# Altium PCB Micromouse_PCB.PcbDoc (part 2 of 3)
Units mm, origin at the board's own origin, x right, y up, seen from the top; angles counter-clockwise.
Board outline 89.28 x 101.5 mm, 2 copper layers (Top Layer, Bottom Layer); 118 components, 108 nets, 360 pads, 157 vias.
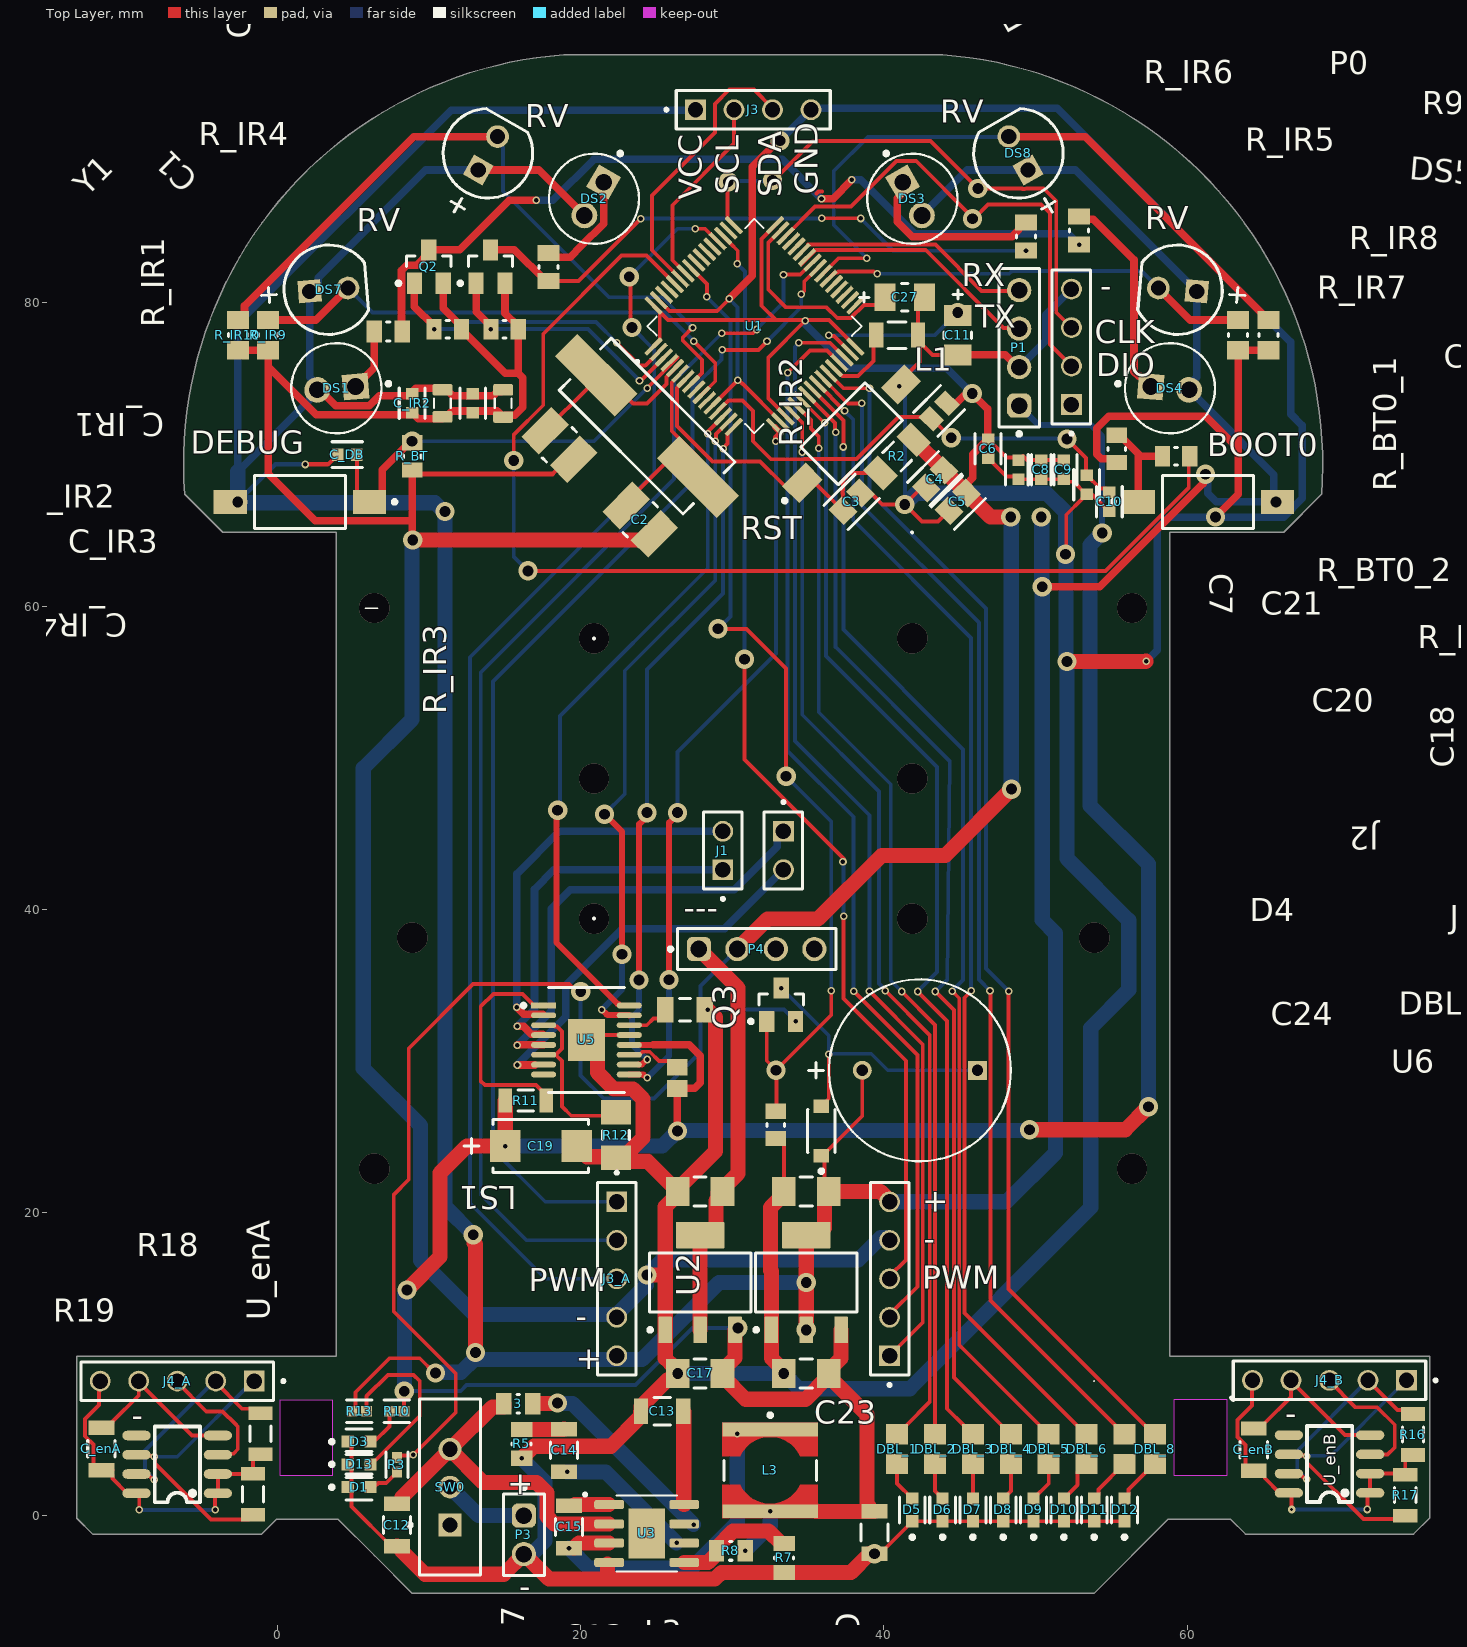
[diagram p0: Top Layer view]

## Via types
v1: diameter 0.5, hole 0.3, Top Layer to Bottom Layer, 87 vias
v2: diameter 1.27/1.27 (per signal layer), hole 0.711, Top Layer to Bottom Layer, 48 vias
v3: diameter 2, hole 2, Top Layer to Bottom Layer, 11 vias
v4: diameter 1.27, hole 0.711, Top Layer to Bottom Layer, 8 vias
v5: diameter 0.5, hole 0.2, Top Layer to Bottom Layer, 1 vias
v6: diameter 2/2 (per signal layer), hole 2, Top Layer to Bottom Layer, 1 vias
v7: diameter 1, hole 0.3, Top Layer to Bottom Layer, 1 vias

## Nets (pads, with @x,y where several pads share a name; then routed paths per layer and width w, separated by ;. In a path a pad name is that pad's centre, name@x,y a point inside that pad or via, vN(x,y) a via of type N, cw(c..) or ccw(c..) an arc to the next point about the centre after c; other vN are vias at no path point) (continued)
DBL_6: (continued)
  Bottom Layer w0.254: v1(37.403,72.882) 37.975,72.311 37.975,65.675 45.75,57.9 v1(45.75,34.625)
DBL_7: DBL_7.2 U1.26 | length 78.5
  Top Layer w0.254: U1.26@35.996,74.996 37.617,73.375 v1(38.55,73.375) ; v1(47,34.625) 47.027,34.598 47.027,14.198 55.277,5.948 55.277,5.898 55.825,5.35 DBL_7.2@55.875,5.35
  Bottom Layer w0.254: v1(38.55,73.375) 38.55,66.625 46.268,58.907 46.268,35.357 v1(47,34.625)